# EAGLE board PygmyPI_v1p00 (EAGLE 5.11)
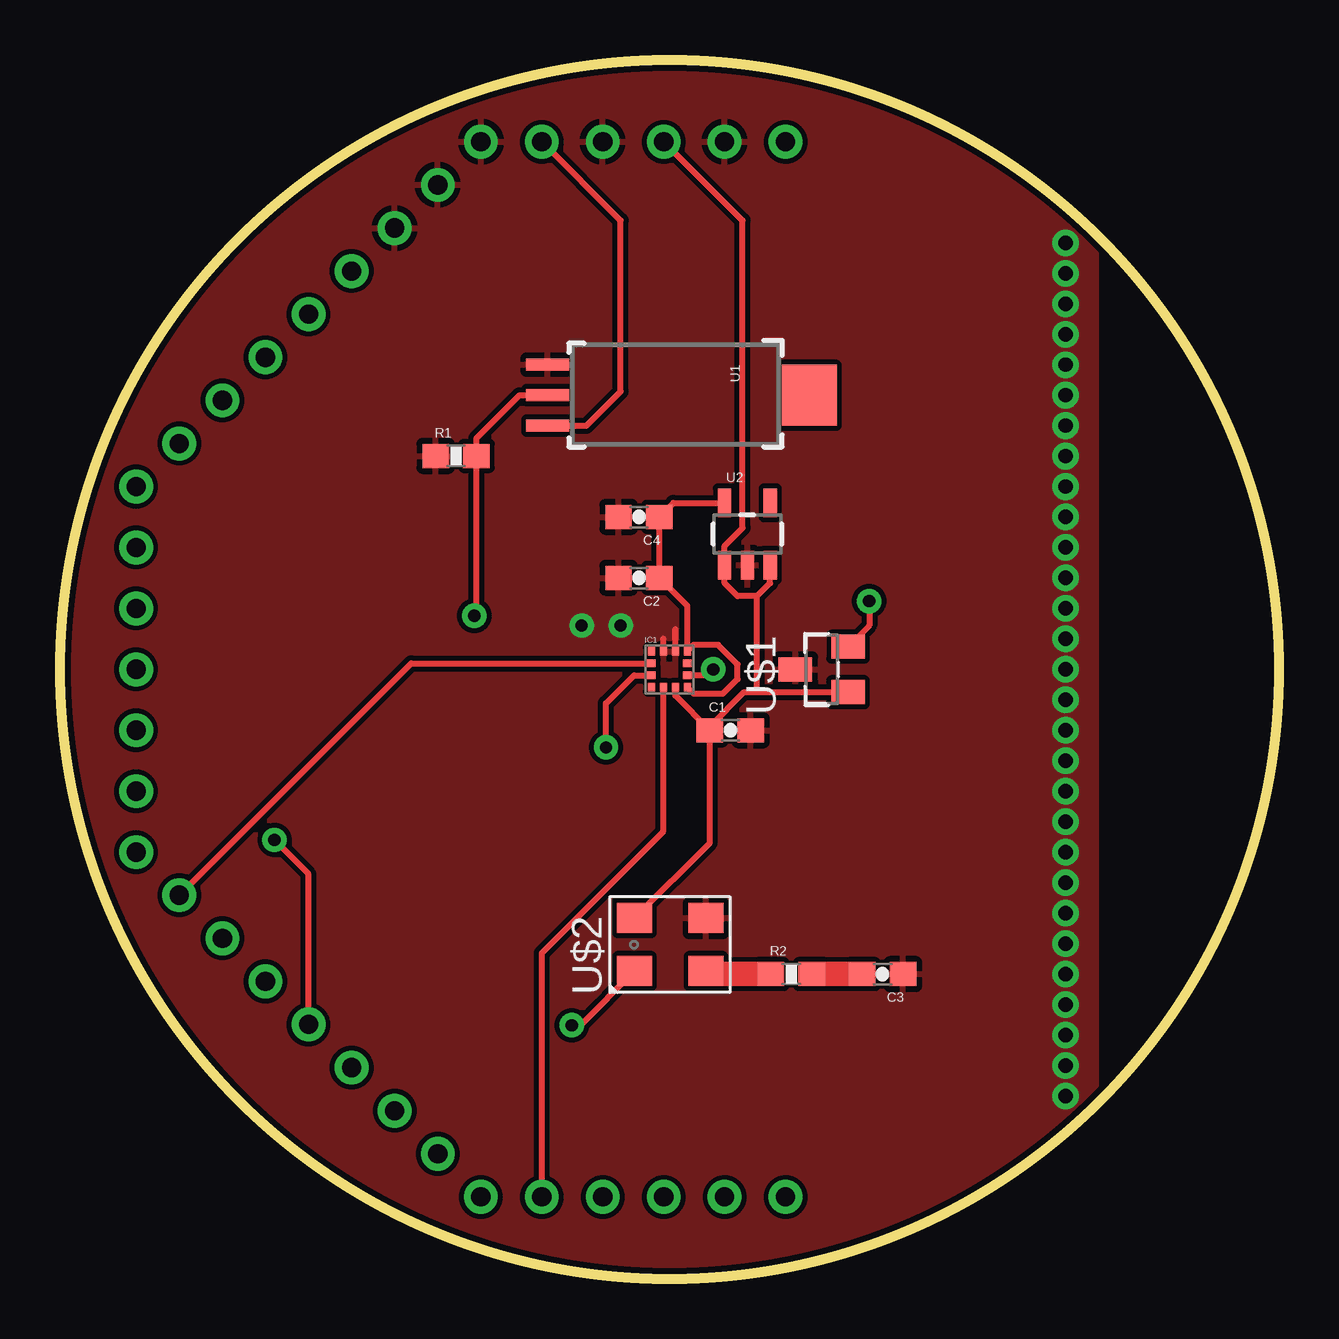
[diagram p0: board, top side]
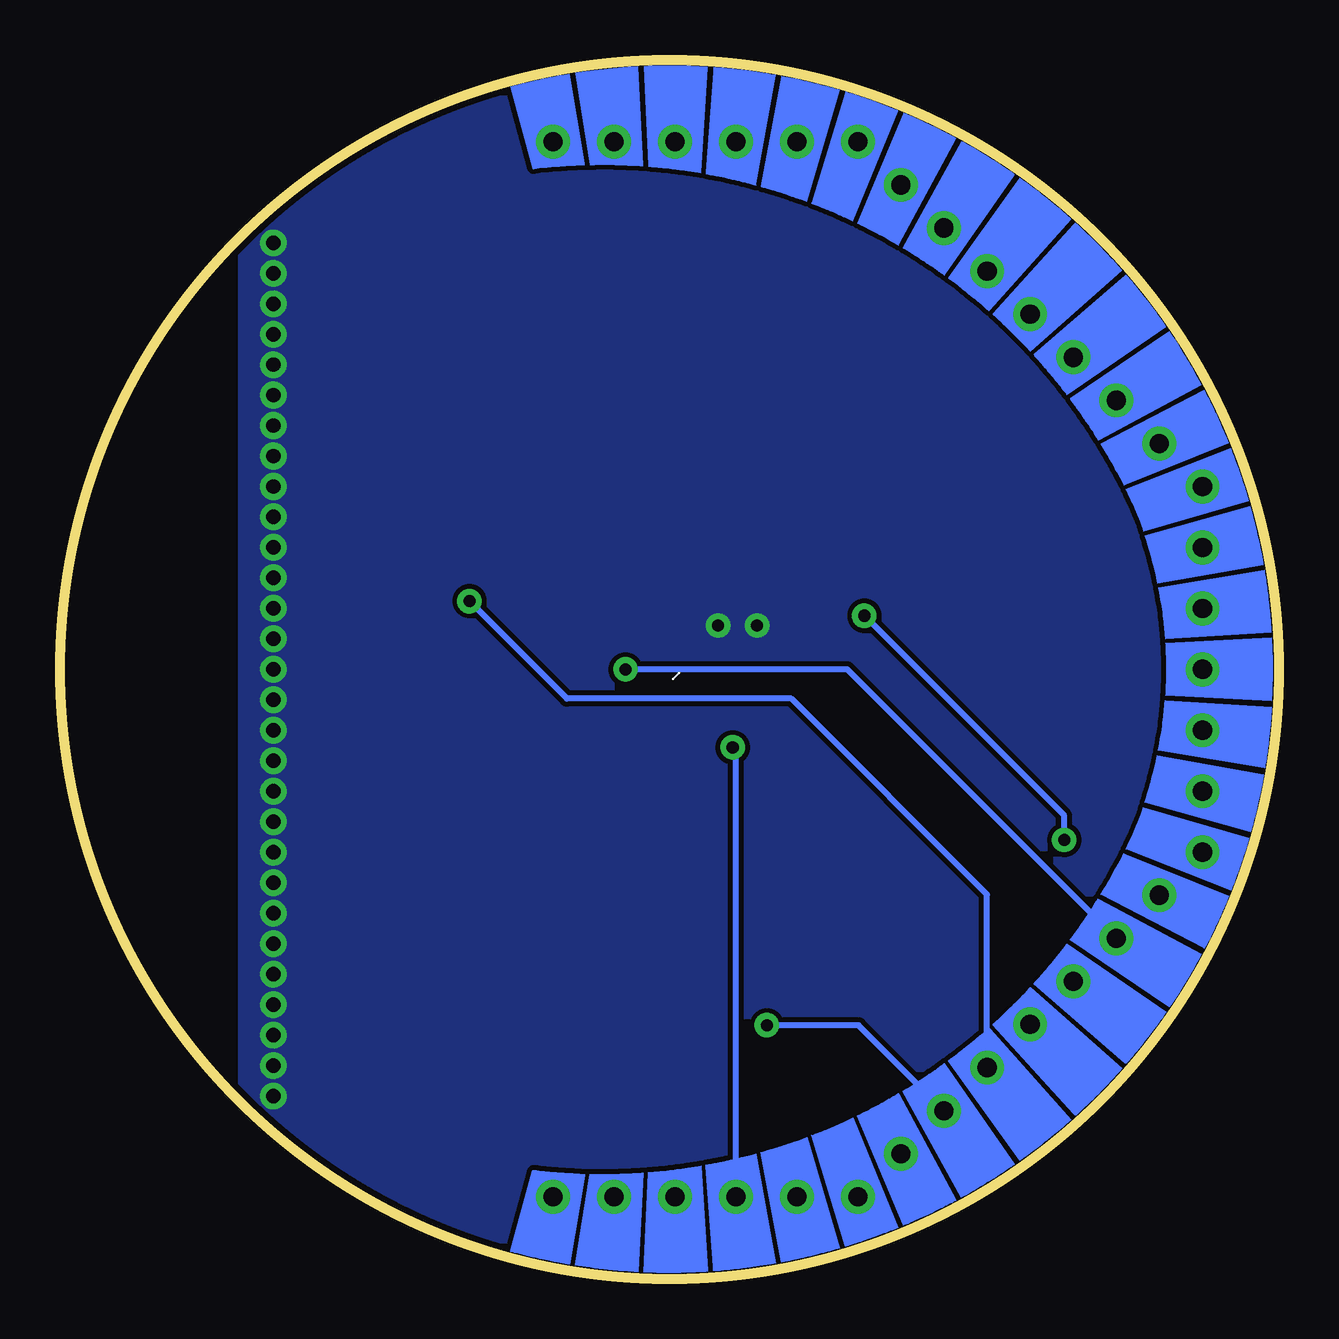
[diagram p1: board, bottom side, seen from below]

Size 50.8 x 50.8 mm. Coordinates in mm from the lower left corner, seen from the top.
Outline: circle at 25.4,25.4 radius 25.4
Copper layers (1*16): Top 0.035mm / dielectric 1.5mm / Bottom 0.035mm
Design rules "BatchPcb (Production)": minimum track width 8mil, minimum drill 20mil, track to track 8mil, track to pad 8mil, pad to pad 4mil, via to via 8mil, smd to smd 4mil, copper to edge 10mil, drill to drill 8mil, minimum pad ring 12mil, minimum via ring 10mil, stop-mask expansion 4mil, vias tented up to drill 25mil, thermal gap 10mil

## Footprints (pad centres in the part's own frame; a part is rotated, then mirrored left to right if it is on the bottom)
0603-CAP = smd 1.1 x 1: 1 -0.85,0; 2 0.85,0
ETXFP = drill 0.8 round: 3.3V -0.237,-21.988; 5V -5.316,-21.988; A0 -11.448,18.396; A1 -13.245,16.6; A2 -15.04,14.804; A3 -16.837,13.008; A4 -22.225,2.54; A5 -22.225,0; A6 -15.04,-14.804; A7 -13.245,-16.6; BAT 4.843,-21.988; COM1_RX -0.236,21.988; COM1_TX 2.304,21.988; COM2_RX -22.225,-5.08; COM2_TX -22.225,-2.54; D0 -22.225,5.08; D1 -22.225,7.62; D2 -20.429,9.416; D3 -18.633,11.212; DAC1 -22.225,-7.62; DAC2 -20.429,-9.416; GND1 -11.448,-18.396; GND2 -9.652,-20.192; GND3 -7.856,-21.988; GND4 -2.776,-21.988; GND5 2.303,-21.988; MCO 4.844,21.988; T0 -2.776,21.988; T1 -5.316,21.988; T2 -7.856,21.988; T3 -9.652,20.192; TA0 -18.633,-11.212; TA1 -16.837,-13.008
LGA12 = smd 0.3 x 0.35: 1 -0.75,-0.75; 2 -0.25,-0.75; 3 0.25,-0.75; 4 0.75,-0.75; 7 0.75,0.75; 8 0.25,0.75; 9 -0.25,0.75; 10 -0.75,0.75 | smd 0.35 x 0.3: 5 0.75,-0.25; 6 0.75,0.25; 11 -0.75,0.25; 12 -0.75,-0.25
0603-RES = smd 1.1 x 1: 1 -0.85,0; 2 0.85,0
HIH-4030 = smd 0.508 x 1.778: 1 -1.27,-5.08; 2 0,-5.08; 3 1.27,-5.08 | smd 2.54 x 2.286: NC 0,5.842
SOT23-5 = smd 0.55 x 1.2: 1 -0.95,-1.3; 2 0,-1.3; 3 0.95,-1.3; 4 0.95,1.3; 5 -0.95,1.3
SOT23 = smd 1 x 1.4: 1 -0.95,-1.1; 2 0.95,-1.1; 3 0,1.1
SPM0408HE5H = smd 1.245 x 1.448: 1 -1.143,1.448; 2 -1.143,-1.524; 3 1.067,-1.524; 4 1.067,1.448

## Placement (x,y rotation side)
C1  100nF  [0603-CAP]  27.94,22.86 0 top
C2  100nF  [0603-CAP]  24.13,29.21 180 top
C3  0.47uF  [0603-CAP]  34.29,12.7 180 top
C4  1uF  [0603-CAP]  24.13,31.75 180 top
FP1  ETXFPNORM  [ETXFP]  25.4,25.4 180 bottom
IC1  BMA220LGA  [LGA12]  25.4,25.4 0 top
INFO1  Evan Teitelman  [CC-BY-SA]  -5.08,-12.7 0 top  (outside the outline)
R1  80K  [0603-RES]  16.51,34.29 0 top
R2  0.0  [0603-RES]  30.48,12.7 0 top
U1  HIH-4030SMD  [HIH-4030]  25.4,36.83 270 top
U2  V_REG_LDOSMD  [SOT23-5]  28.65,31.04 0 top
U$1  MICROCHIP-TEMP-TC1047  [SOT23]  31.75,25.4 90 top
U$2  MIC_KNOWLES_SPM0408HE5H  [SPM0408HE5H]  25.4,13.97 90 top

## Library data of the parts
C1-C4 R1 R2 U1 U2 = SparkFun
FP1 U$2 = Pygmy
IC1 INFO1 = EagleLbr
U$1 = dublib

## Nets
1.8V: C2.1 C4.1 IC1.4 IC1.7 U2.5
3.3V: C1.1 FP1.3.3V IC1.3 U2.1 U2.3 U$1.1 U$2.4
5V: FP1.5V U1.3
GAIN: R2.1 U$2.2
GND: C1.2 C2.2 C3.1 C4.2 FP1.GND1 FP1.GND2 FP1.GND3 FP1.GND4 FP1.GND5 IC1.8 IC1.9 R1.1 U1.1 U2.2 U$1.3 U$2.3
INT: FP1.D3 IC1.5
MIC: FP1.A0 U$2.1
MOIS: FP1.A2 R1.2 U1.2
N$1: C3.2 R2.2
PS: FP1.D2 IC1.11
SCL: FP1.T0 IC1.12
SDA: FP1.T1 IC1.2
TEMP: FP1.A1 U$1.2

## Tracks (layer width: path | path; a pad name or v marks a point on that pad's centre or on a via)
1.8V
  Top 0.254: IC1.4 26.42,24.38 27.64,24.38 28.25,24.99 28.25,25.6 27.43,26.42 26.42,26.42 IC1.7 26.15,28.04 C2.1 C4.1 25.57,32.34 U2.5
3.3V
  Top 0.254: IC1.3 25.65,24.3 C1.1 | U2.3 29.6,28.99 29.06,28.45 | 29.06,28.45 28.25,28.45 27.7,28.99 U2.1 27.7,30.55 28.45,31.29 28.45,44.1 FP1.3.3V | C1.1 27.09,18.17 U$2.4 | C1.1 27.09,23.03 28.51,24.45 29.06,24.45 | 29.06,24.45 U$1.1 | 29.06,24.45 29.06,28.45
5V
  Top 0.254: U1.3 21.95,35.56 23.37,36.98 23.37,44.1 FP1.5V
GAIN
  Top 1.016: U$2.2 27.05,12.7 R2.1
GND  (via drill 0.51, 0.6)
  Top 0.254: IC1.8 25.65,27.08 | 25.15,26.67 IC1.9
  other vias: 41.91,41.91 41.91,40.64 41.91,39.37 41.91,38.1 41.91,36.83 41.91,35.56 41.91,33.02 41.91,34.29 41.91,31.75 41.91,30.48 41.91,29.21 41.91,27.94 41.91,26.67 41.91,25.4 41.91,24.13 41.91,22.86 41.91,21.59 41.91,20.32 41.91,19.05 41.91,17.78 41.91,16.51 41.91,15.24 41.91,13.97 41.91,12.7 41.91,11.43 41.91,10.16 41.91,8.89 41.91,7.62 41.91,43.18 23.37,27.23 21.74,27.23
  pour Top: -2.54,53.34 43.18,53.34 43.18,-2.54 -2.54,-2.54
  pour Bottom: -5.08,55.88 43.18,55.88 43.18,-5.08 -5.08,-5.08
INT  (via drill 0.51)
  Top 0.254: IC1.5 26.98,25.15 v27.23,25.4
  Bottom 0.254: v27.23,25.4 17.98,25.4 FP1.D3
MIC  (via drill 0.51)
  Top 0.254: U$2.1 21.69,10.57 v21.34,10.57
  Bottom 0.254: v21.34,10.57 17.51,10.57 FP1.A0
MOIS  (via drill 0.51)
  Top 0.254: U1.2 19.15,36.83 17.36,35.04 R1.2 17.36,27.72 v17.27,27.64 | v8.94,18.29 10.36,16.87 FP1.A2
  Bottom 0.254: v17.27,27.64 8.94,19.3 v8.94,18.29
N$1
  Top 1.016: R2.2 C3.2
PS
  Top 0.254: IC1.11 14.64,25.65 FP1.D2
SCL  (via drill 0.51)
  Top 0.254: v22.76,22.15 22.76,23.98 23.93,25.15 IC1.12
  Bottom 0.254: FP1.T0 22.62,22.01 v22.76,22.15
SDA
  Top 0.254: IC1.2 25.15,18.65 20.08,13.58 FP1.T1
TEMP  (via drill 0.51)
  Top 0.254: U$1.2 33.73,27.23 v33.73,28.25
  Bottom 0.254: v33.73,28.25 29.67,24.18 20.32,24.18 12.15,16.02 FP1.A1

## Text on the board
Document: Note: This Board Is Mirrored